# Altium PCB PW_GEN_V2.PcbDoc (part 1 of 2)
Units mm, origin at the board's own origin, x right, y up, seen from the top; angles counter-clockwise.
Board outline 65 x 40.7 mm, 6 copper layers (Top Layer, Layer 2, Layer 3, Layer 4, Layer 5, Bottom Layer), stack 1.548 mm thick; 102 components, 54 nets, 409 pads, 516 vias.
Unrouted connection lines stored in the file: 64.
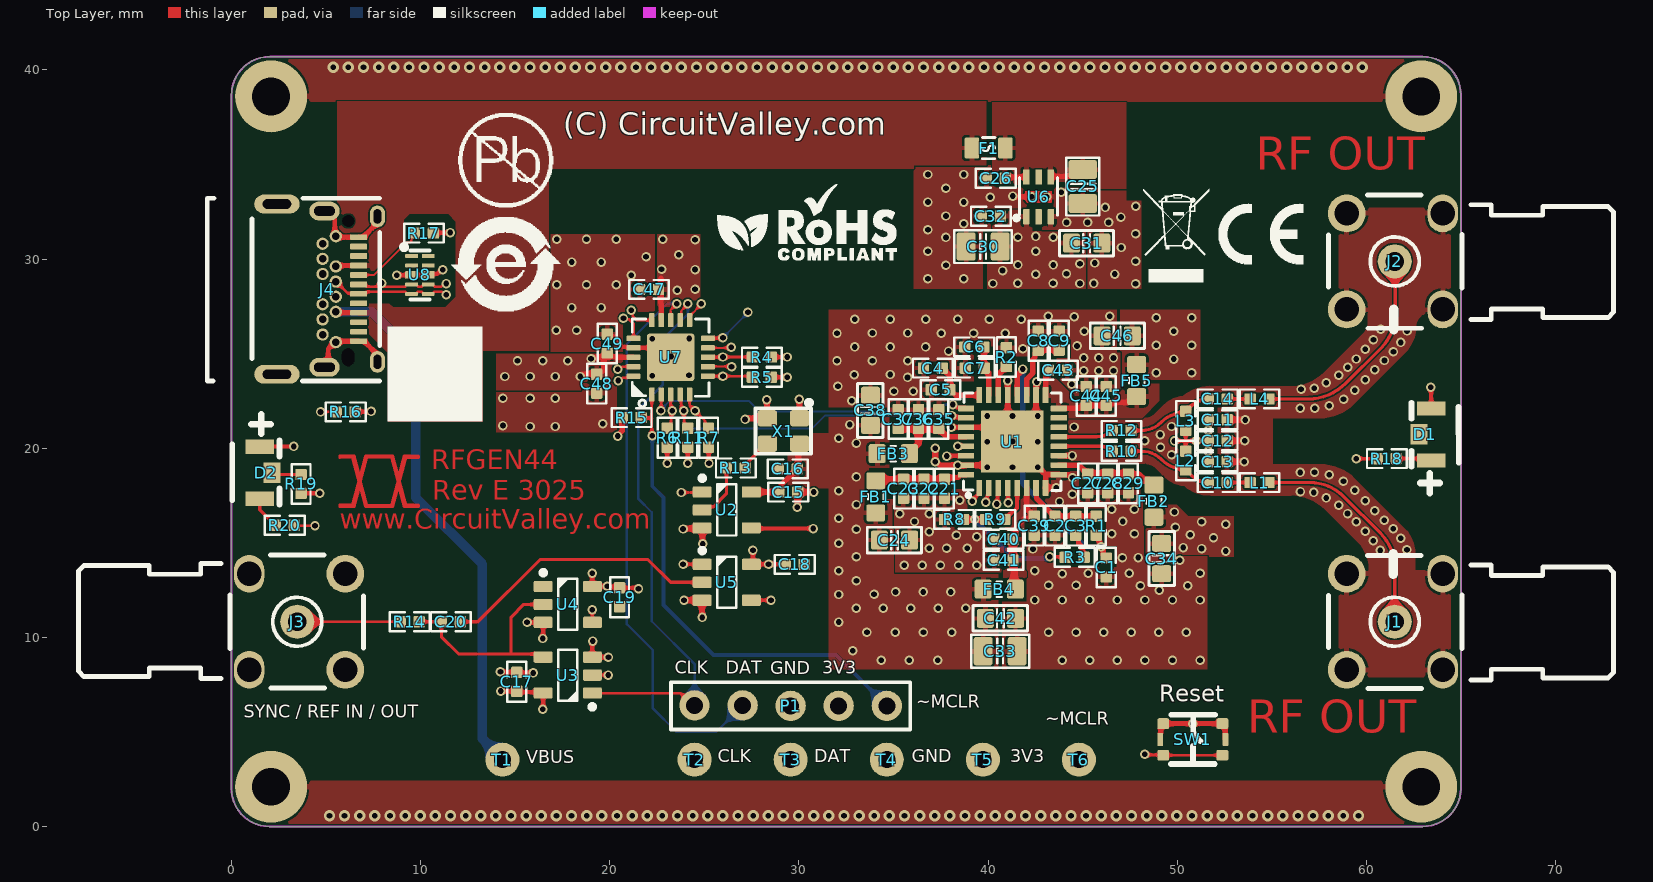
[diagram p0: Top Layer view]
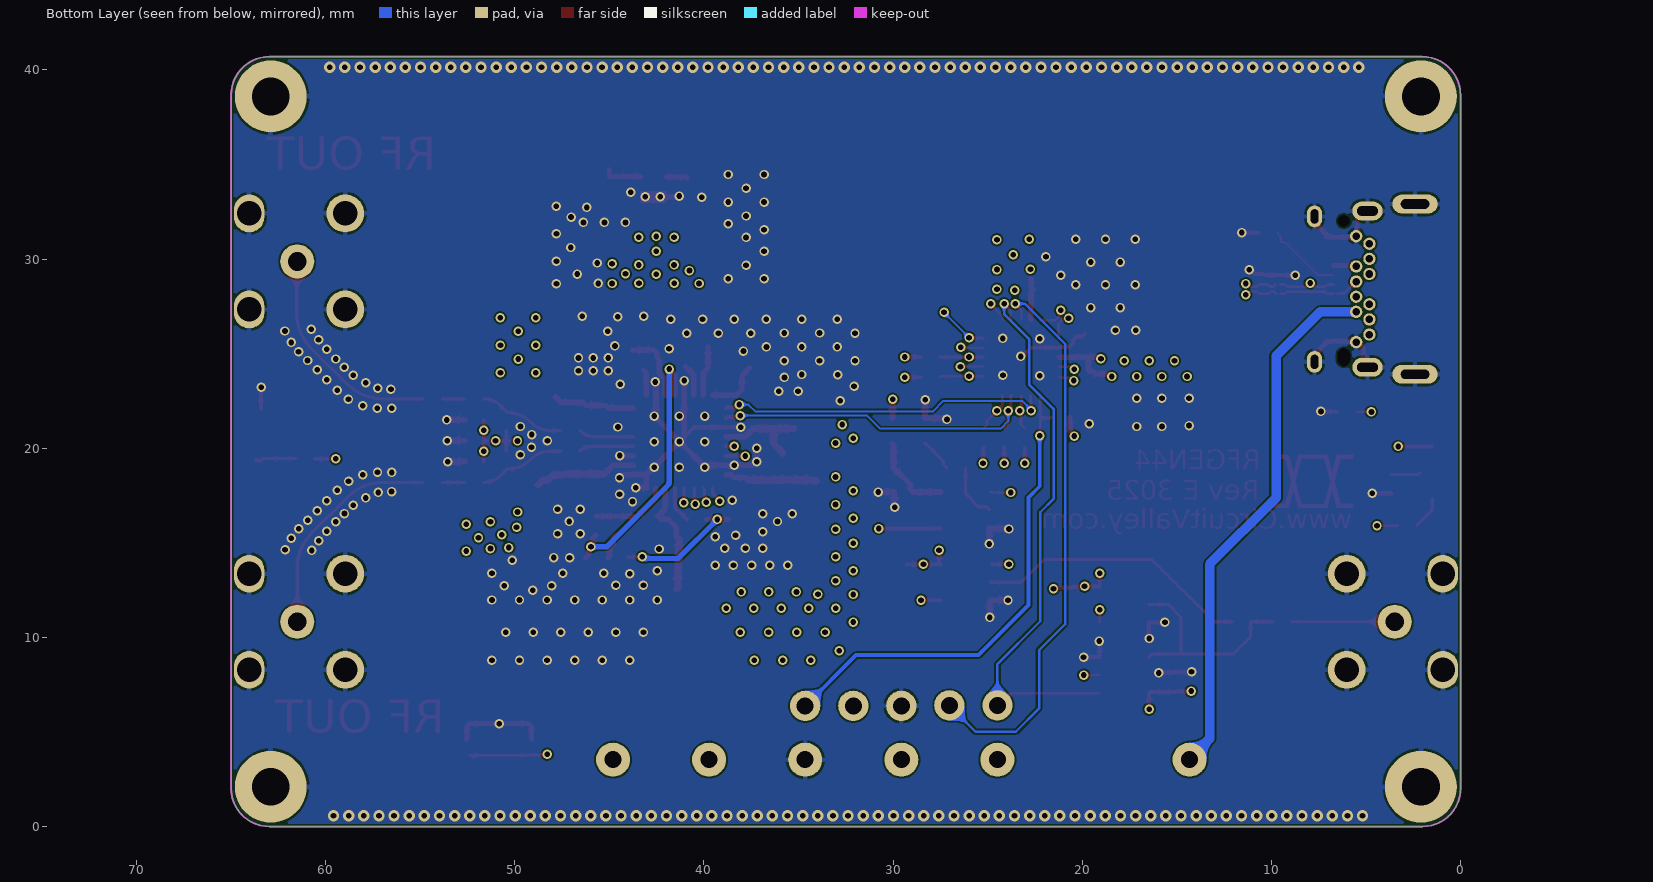
[diagram p1: Bottom Layer view, seen from below]
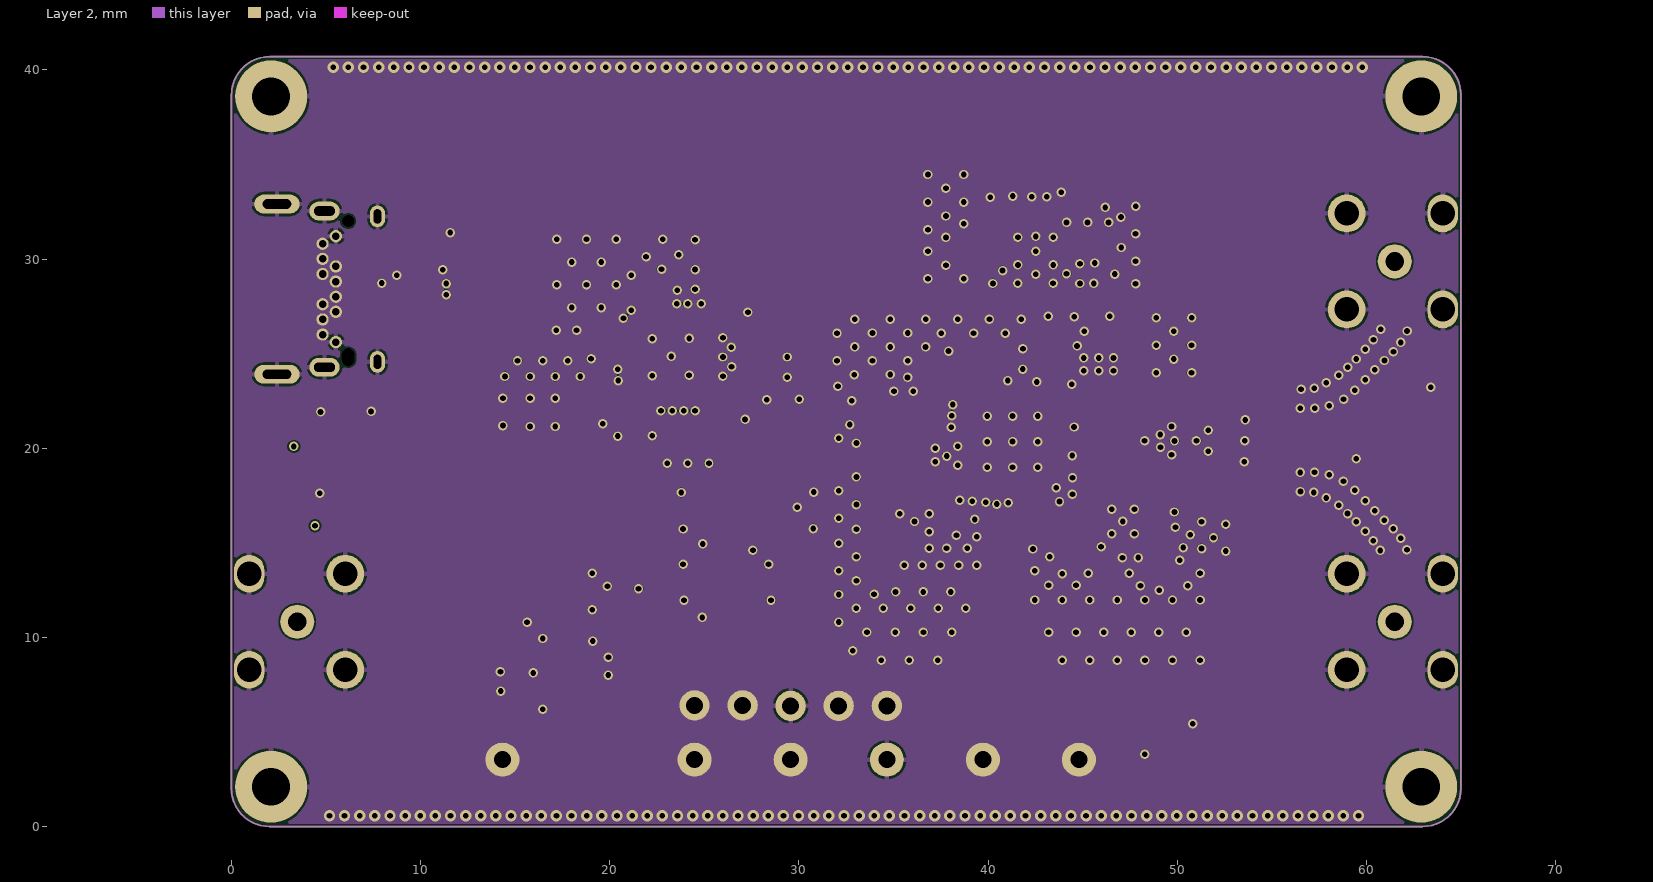
[diagram p2: Layer 2]
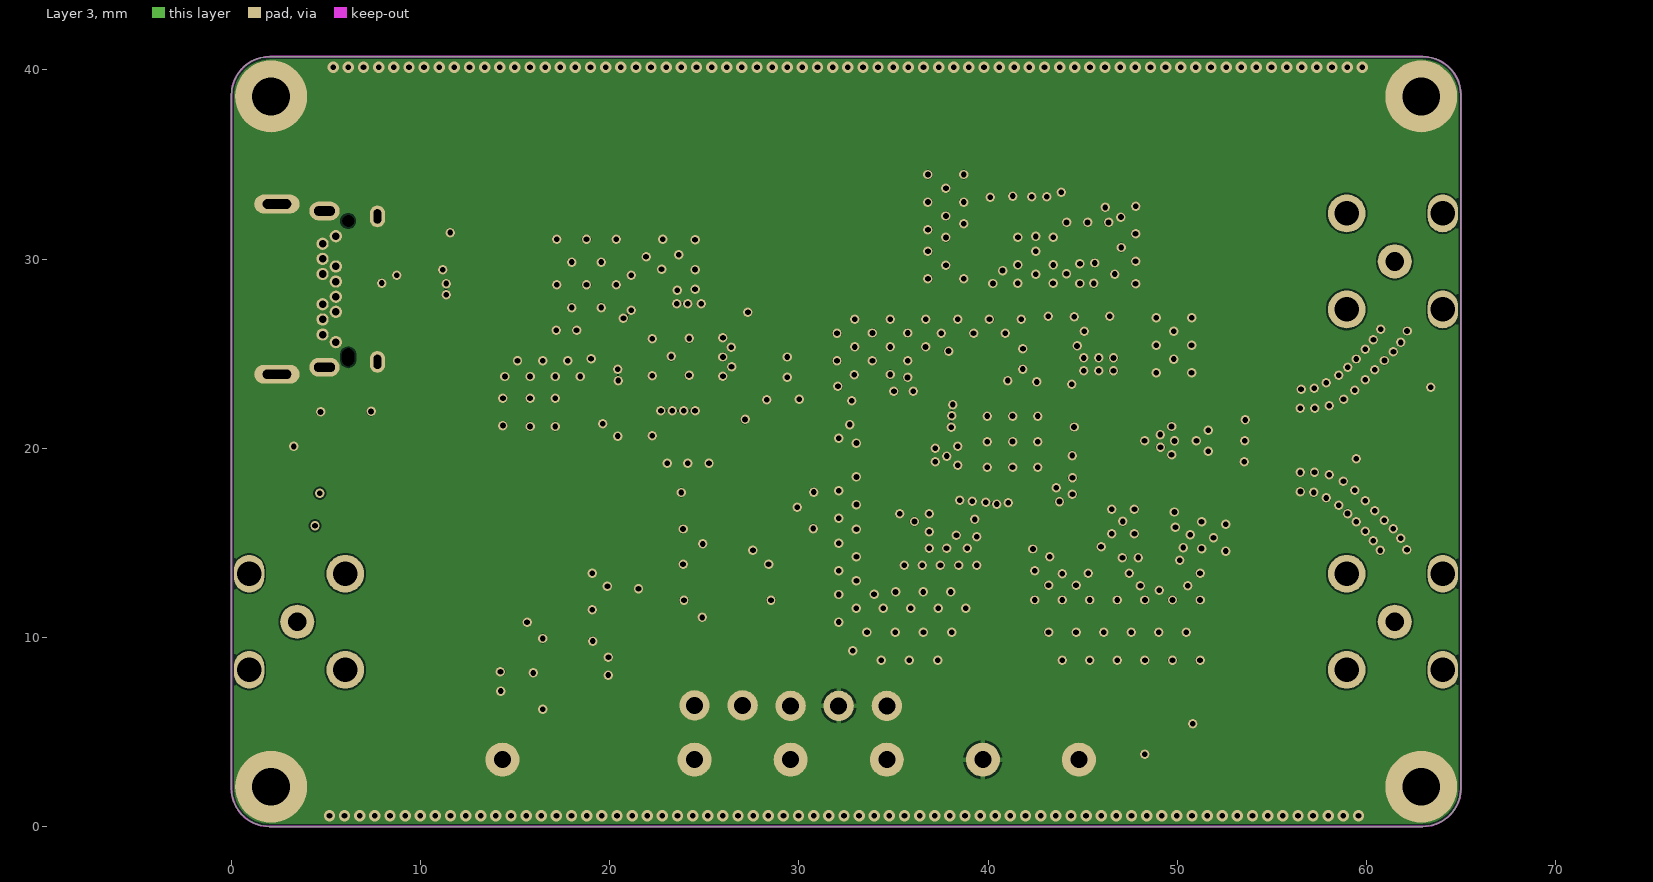
[diagram p3: Layer 3]
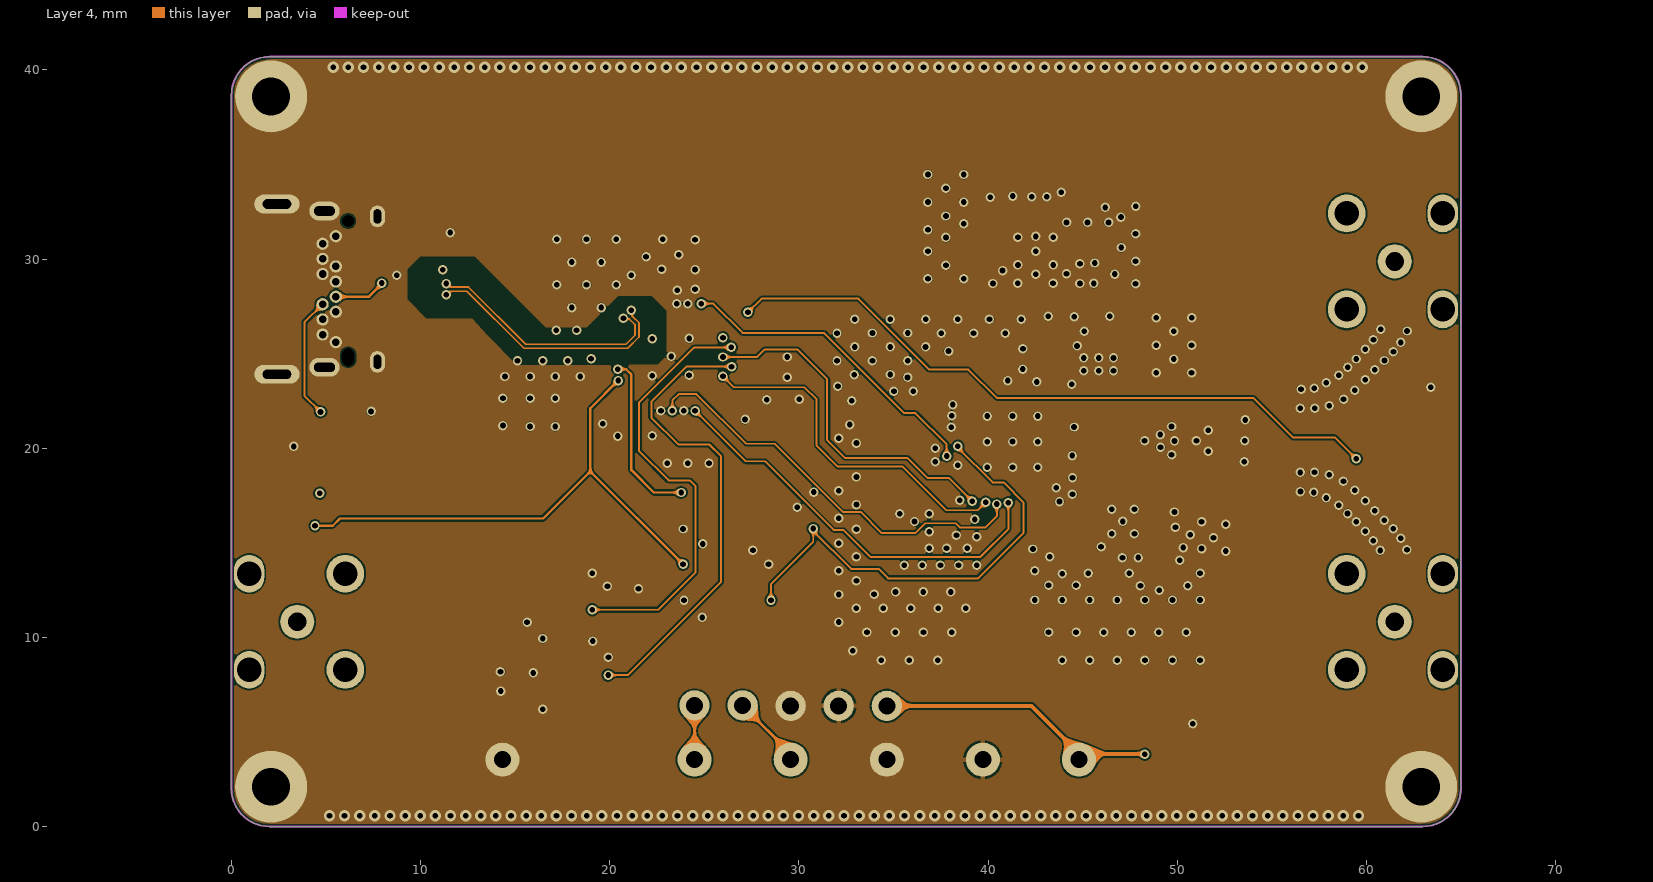
[diagram p4: Layer 4]
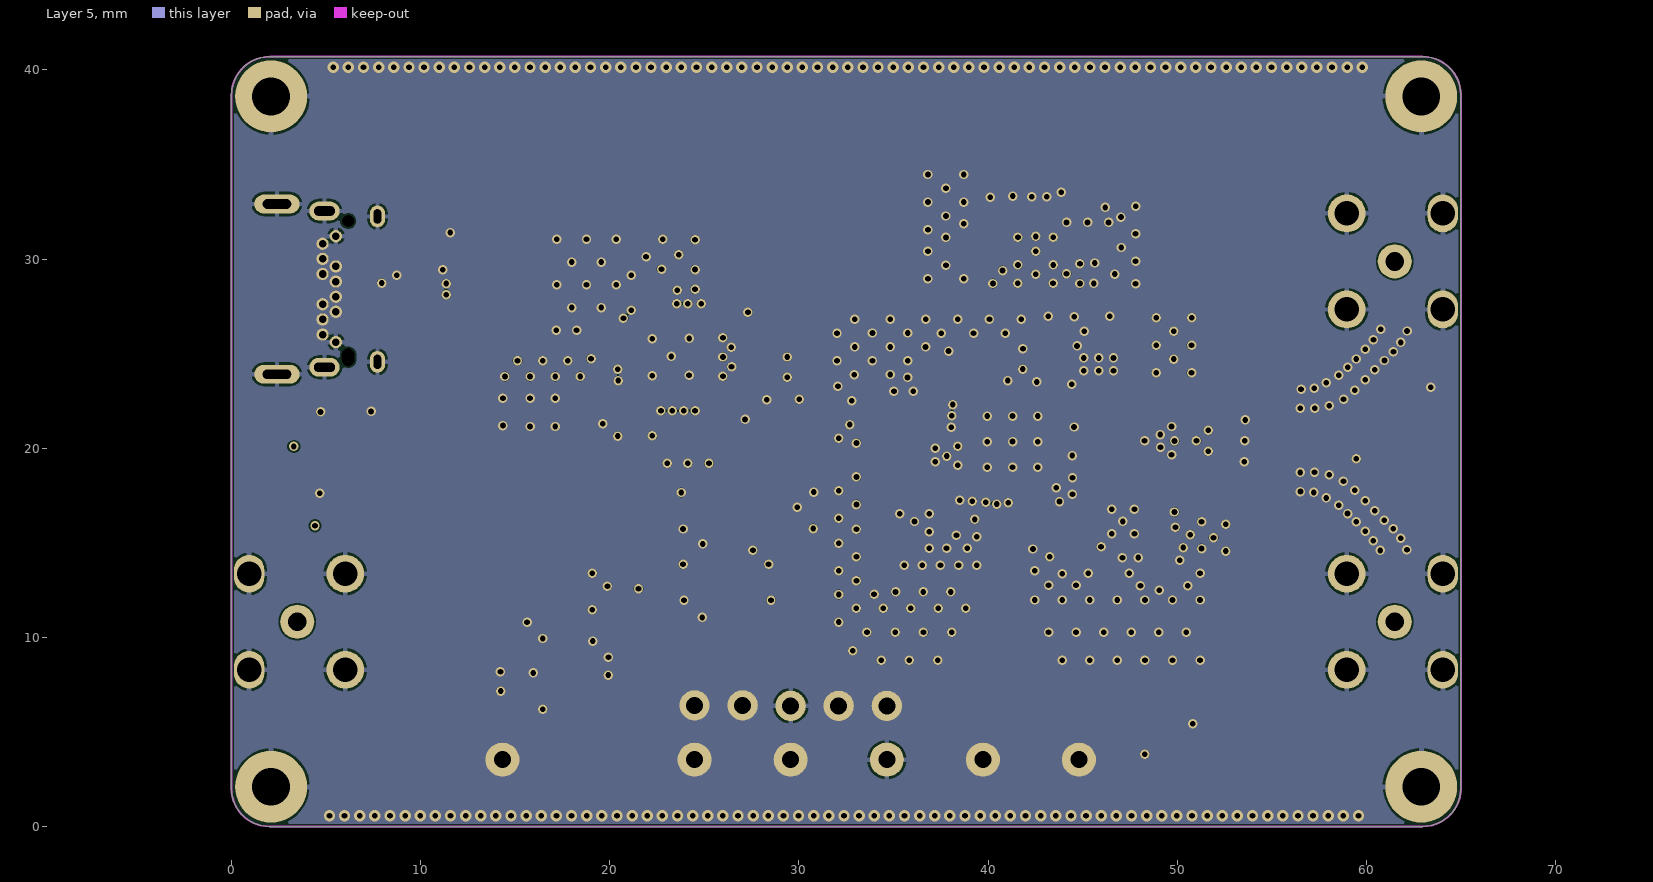
[diagram p5: Layer 5]
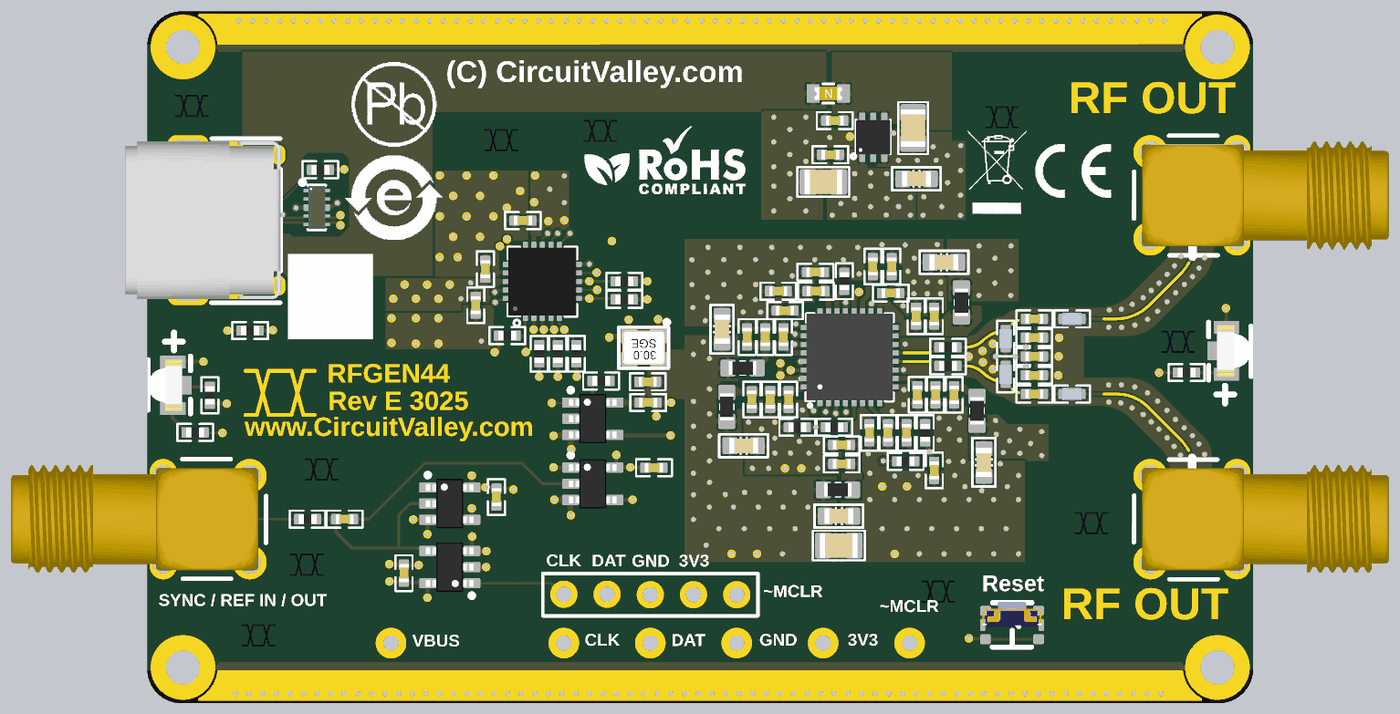
[diagram p7: 3D render of the assembled board from above, using the file's embedded part models]

## Layer stack, top to bottom
Top Solder: solder mask 0.0102, Solder Resist, Dk 3.5
Top Layer: signal copper 0.035
Dielectric 2: prepreg 0.0994, PP-015, Dk 4.3
Layer 2: signal copper 0.0175
Dielectric 4: core 0.55, FR-4, Dk 4.5
Layer 3: signal copper 0.0175
Dielectric 1: prepreg 0.1088, PP-016, Dk 4.4
Layer 4: signal copper 0.0175
Dielectric 5: core 0.55, FR-4, Dk 4.5
Layer 5: signal copper 0.0175
Dielectric 3: prepreg 0.0994, PP-015, Dk 4.3
Bottom Layer: signal copper 0.035
Bottom Solder: solder mask 0.0102, Solder Resist, Dk 3.5

## Board outline
0,2.007 ccw(c2.007,2.007) 2.007,0 62.975,0 ccw(c62.975,2.025) 65,2.025 64.998,2.025 64.998,38.662 ccw(c62.96,38.662) 62.96,40.7 2.038,40.7 ccw(c2.038,38.662) 0,38.662

## Design rules (kind name [scope] priority, off if disabled: settings)
Clearance [All] p1: gap=0.09 ignorepadtopadclearanceinfootprint=FALSE
ComponentClearance [All] p1: gap=0.254 collisioncheckmode=3 verticalgap=0 showdistances=FALSE
DiffPairsRouting [All] p1: maxlimit=0.127 minlimit=0.09 mostfreqgap=0.127 toplayer_minwidth=0.09 toplayer_maxwidth=0.254 toplayer_prefwidth=0.09 midlayer1_minwidth=0.09 midlayer1_maxwidth=0.254 midlayer1_prefwidth=0.09 midlayer2_minwidth=0.09 midlayer2_maxwidth=0.254 midlayer2_prefwidth=0.09 midlayer3_minwidth=0.09 midlayer3_maxwidth=0.254 midlayer3_prefwidth=0.09 midlayer4_minwidth=0.09 midlayer4_maxwidth=0.254 midlayer4_prefwidth=0.09 bottomlayer_minwidth=0.09 bottomlayer_maxwidth=0.254 bottomlayer_prefwidth=0.09 maxuncoupledlength=12.7
HoleSize [All] p1: absolutevalues=TRUE maxlimit=5 minlimit=0.025 maxpercent=80.000 minpercent=20.000
HoleToHoleClearance [All] p1: gap=0.2 allowstackedmicrovias=TRUE
MatchedLengths MatchedLengths_DDR_CLOCKS_STROBES [InxSignalClass('ADDR_PP1') OR InxSignalClass('ADDR_PP2') OR InxSignalClass('DATA_BL0') OR InxSignalClass('DATA_BL1') OR InxSignalClass('DATA_BL2') OR InxSignalClass('DATA_BL3')] p1: tolerance=0 checknetsindiffpair=TRUE checkdiffpairvsdiffpair=FALSE checkxsignals=FALSE checkothers=FALSE usedelayunits=TRUE delaytolerance=0.500000
MatchedLengths MatchedLengths_DATA_BL3 [InxSignalClass('DATA_BL3')] p2: tolerance=0 checknetsindiffpair=FALSE checkdiffpairvsdiffpair=TRUE checkxsignals=TRUE checkothers=TRUE usedelayunits=TRUE delaytolerance=0.500000
MatchedLengths MatchedLengths_DATA_BL2 [InxSignalClass('DATA_BL2')] p3: tolerance=0 checknetsindiffpair=FALSE checkdiffpairvsdiffpair=TRUE checkxsignals=TRUE checkothers=TRUE usedelayunits=TRUE delaytolerance=0.500000
MatchedLengths MatchedLengths_DATA_BL1 [InxSignalClass('DATA_BL1')] p4: tolerance=0 checknetsindiffpair=FALSE checkdiffpairvsdiffpair=TRUE checkxsignals=TRUE checkothers=TRUE usedelayunits=TRUE delaytolerance=0.500000
MatchedLengths MatchedLengths_DATA_BL0 [InxSignalClass('DATA_BL0')] p5: tolerance=0 checknetsindiffpair=FALSE checkdiffpairvsdiffpair=TRUE checkxsignals=TRUE checkothers=TRUE usedelayunits=TRUE delaytolerance=0.500000
MatchedLengths MatchedLengths_ADDR_PP2 [InxSignalClass('ADDR_PP2')] p6: tolerance=0 checknetsindiffpair=FALSE checkdiffpairvsdiffpair=TRUE checkxsignals=TRUE checkothers=TRUE usedelayunits=TRUE delaytolerance=0.500000
MatchedLengths MatchedLengths_ADDR_PP1 [InxSignalClass('ADDR_PP1')] p7: tolerance=0 checknetsindiffpair=FALSE checkdiffpairvsdiffpair=TRUE checkxsignals=TRUE checkothers=TRUE usedelayunits=TRUE delaytolerance=0.500000
MatchedLengths Matched_ETH_GRP [InNetClass('ETH')] p8: tolerance=0.127 checknetsindiffpair=FALSE checkdiffpairvsdiffpair=TRUE checkxsignals=TRUE checkothers=TRUE usedelayunits=TRUE delaytolerance=4.000000
MatchedLengths Matched_ETH_MD_GRP [InNetClass('ETH_MD')] p9: tolerance=0.508 checknetsindiffpair=FALSE checkdiffpairvsdiffpair=TRUE checkxsignals=TRUE checkothers=TRUE usedelayunits=TRUE delaytolerance=4.000000
MatchedLengths Matched_SD_GRP [InNetClass('SD')] p10: tolerance=2.54 checknetsindiffpair=FALSE checkdiffpairvsdiffpair=TRUE checkxsignals=TRUE checkothers=TRUE usedelayunits=TRUE delaytolerance=17.000000
MatchedLengths Matched_SD_B_GRP [InNetClass('SD_B')] p11: tolerance=2.54 checknetsindiffpair=FALSE checkdiffpairvsdiffpair=TRUE checkxsignals=TRUE checkothers=TRUE usedelayunits=TRUE delaytolerance=17.000000
MatchedLengths Matched_USB [InNetClass('USB')] p12: tolerance=2.54 checknetsindiffpair=FALSE checkdiffpairvsdiffpair=TRUE checkxsignals=TRUE checkothers=TRUE usedelayunits=TRUE delaytolerance=4.000000
MatchedLengths Matched_HDMI [InNetClass('HDMI')] p13: tolerance=2.54 checknetsindiffpair=FALSE checkdiffpairvsdiffpair=TRUE checkxsignals=TRUE checkothers=TRUE usedelayunits=TRUE delaytolerance=5.000000
MatchedLengths Matched_HDMI_GRP [InNetClass('HDMI')] p14: tolerance=2.54 checknetsindiffpair=TRUE checkdiffpairvsdiffpair=FALSE checkxsignals=FALSE checkothers=FALSE usedelayunits=TRUE delaytolerance=5.000000
MatchedLengths Matched_DDR_T_GRP [InNetClass('ETH')] p15: tolerance=0.127 checknetsindiffpair=FALSE checkdiffpairvsdiffpair=TRUE checkxsignals=TRUE checkothers=TRUE usedelayunits=TRUE delaytolerance=5.000000
MatchedLengths Matched_DDR_T [InNetClass('MIPI')] p16: tolerance=0.127 checknetsindiffpair=TRUE checkdiffpairvsdiffpair=FALSE checkxsignals=FALSE checkothers=FALSE usedelayunits=TRUE delaytolerance=5.000000
MatchedLengths Matched_MIPI1 [InNetClass('MIPI1')] p17: tolerance=0.127 checknetsindiffpair=FALSE checkdiffpairvsdiffpair=TRUE checkxsignals=TRUE checkothers=TRUE usedelayunits=TRUE delaytolerance=2.000000
MatchedLengths Matched_MIPI0 [InNetClass('MIPI0')] p18: tolerance=0.127 checknetsindiffpair=FALSE checkdiffpairvsdiffpair=TRUE checkxsignals=TRUE checkothers=TRUE usedelayunits=TRUE delaytolerance=2.000000
MatchedLengths Matched_QSPI [InNetClass('QSPI')] p19: tolerance=0.127 checknetsindiffpair=FALSE checkdiffpairvsdiffpair=TRUE checkxsignals=TRUE checkothers=TRUE usedelayunits=TRUE delaytolerance=2.000000
MatchedLengths Matched_GPIF_GRP [InNetClass('GPIF')] p20: tolerance=1.27 checknetsindiffpair=FALSE checkdiffpairvsdiffpair=TRUE checkxsignals=TRUE checkothers=TRUE usedelayunits=TRUE delaytolerance=150.000000
MinimumSolderMaskSliver [All] p1: minsoldermaskwidth=0.1
PlaneClearance [All] p1: clearance=0.152
PlaneConnect PlaneConnect_1 [All] p1: pad.planeconnectstyle=Relief pad.reliefexpansion=0.508 pad.reliefentries=4 pad.reliefconductorwidth=0.254 pad.reliefairgap=0.127 via.planeconnectstyle=Direct via.reliefexpansion=0.508 via.reliefentries=4 via.reliefconductorwidth=0.254 via.reliefairgap=0.254
PolygonConnect [All] p1: thpad.connectstyle=Relief thpad.reliefconductorwidth=0.254 thpad.reliefentries=4 thpad.polygonreliefangle="90 Angle" thpad.airgapwidth=0.127 smdpad.connectstyle=Relief smdpad.reliefconductorwidth=0.254 smdpad.reliefentries=4 smdpad.polygonreliefangle="90 Angle" smdpad.airgapwidth=0.127 via.connectstyle=Direct via.reliefconductorwidth=0.254 via.reliefentries=4 via.polygonreliefangle="90 Angle" via.airgapwidth=0.254
RoutingLayers [All] p1: top layer_v5=TRUE mid layer 1_v5=FALSE mid layer 2_v5=TRUE mid layer 3_v5=TRUE mid layer 4_v5=TRUE bottom layer_v5=TRUE
RoutingTopology RoutingTopology_DDRAddressAndControls [InNetClass('DDR_AddressAndControls')] p1: topology=Daisy_Simple
RoutingTopology [All] p2: topology=Shortest
RoutingVias [All] p1: holewidth=0.2 width=0.3 viastyle="Through Hole" minholewidth=0.2 minwidth=0.3 maxholewidth=0.5 maxwidth=7
SilkToSilkClearance [All] p1: silktosilkclearance=0
SilkToSolderMaskClearance [IsPad] p1: minsilkscreentomaskgap=0 clearancetoexposedcopper=TRUE
SolderMaskExpansion [All] p1: expansion=0 istentingtop=FALSE
Width [All] p1: maxlimit=1.27 minlimit=0.09 preferedwidth=0.09 toplayer_minwidth=0.09 midlayer1_prefwidth=0.127 bottomlayer_minwidth=0.09 bottomlayer_prefwidth=0.127 minimp=50.000000 maximp=50.000000 favimp=50.000000
19 further rules are at their usual default settings.

## Classes and differential pairs
component class RF_GEN: C1 C2 C3 C4 C5 C6 C7 C8 C9 C10 C11 C12 C13 C14 C15 C16 C17 C18 C19 C20 J1 J2 J3 L1 L2 L3 L4 R1 R2 R3 R4 R5 R6 R7 R8 R9 R10 R11 R12 R13 R14 U1 U2 U3 U4 U5 X1
component class power: C21 C22 C23 C24 C25 C26 C27 C28 C29 C30 C31 C32 C33 C34 C35 C36 C37 C38 C39 C40 C41 C42 C43 C44 C45 C46 FB1 FB2 FB3 FB4 FB5 U6
net class USB2: D_N D_P
component class MCU: C47 C48 C49 D1 D2 F1 J4 P1 R15 R16 R17 R18 R19 R20 SW1 T1 T2 T3 T4 T5 T6 U7 U8
differential pair D: +D_P -D_N

## Components (designator, comment, footprint, x,y, rotation, side; value= is the part's Value field where it differs from the comment)
C1 "680p" CAPC1005N 46.253,13.694 r270 top
C2 "2.7n" CAPC1005N 43.536,15.904 r270 top
C3 "47n" CAPC1005N 44.628,15.904 r270 top
C4 "100n" CAPC1005N 37.084,24.235 r180 top
C5 "10p" CAPC1005N 37.49,23.092 r180 top
C6 "100n" CAPC1005N 39.268,25.352 r180 top
C7 "10p" CAPC1005N 39.294,24.235 r180 top
C8 "100n" CAPC1005N 42.647,25.683 r90 top
C9 "10p" CAPC1005N 43.759,25.683 r90 top
C10 "1n" CAPC1005N 52.143,18.185 r180 top
C11 "120p" CAPC1005N 52.138,21.499 r180 top
C12 "100n" CAPC1005N 52.138,20.395 r180 top
C13 "120p" CAPC1005N 52.138,19.29 r180 top
C14 "1n" CAPC1005N 52.143,22.604 r180 top
C15 "100n" CAPC1005N 29.439,17.683 r180 top
C16 "100n" CAPC1005N 29.413,18.902 r0 top
C17 "100n" CAPC1005N 15.088,7.65 r270 top
C18 "100n" CAPC1005N 29.779,13.852 r180 top
C19 "100n" CAPC1005N 20.521,12.123 r90 top
C20 "100n" CAPC1005N 11.6,10.825 r180 top
C21 "10p" CAPC1005N 37.694,17.859 r270 top
C22 "100n" CAPC1005N 36.614,17.859 r270 top
C23 "470n" CAPC1005N 35.535,17.859 r270 top
C24 "approved sub OK" CAPC1608N 35.052,15.142 r0 top value=10u
C25 "approved sub OK" CAPC2012N 45.009,33.837 r270 top value=100u
C26 "100n" CAPC1005N 40.403,34.269 r0 top
C27 "10p" CAPC1005N 45.263,18.139 r270 top
C28 "100n" CAPC1005N 46.33,18.139 r270 top
C29 "470n" CAPC1005N 47.422,18.139 r270 top
C30 "approved sub OK" CAPC2012N 39.74,30.662 r180 top value=100u
C31 "approved sub OK" CAPC1608N 45.212,30.842 r0 top value=10u
C32 "100n" CAPC1005N 40.149,32.263 r0 top
C33 "approved sub OK" CAPC2012N 40.64,9.271 r0 top value=100u
C34 "approved sub OK" CAPC1608N 49.174,14.164 r270 top value=10u
C35 "10p" CAPC1005N 37.389,21.542 r90 top
C36 "100n" CAPC1005N 36.322,21.542 r90 top
C37 "470n" CAPC1005N 35.255,21.542 r90 top
C38 "approved sub OK" CAPC1608N 33.782,22.001 r90 top value=10u
C39 "10p" CAPC1005N 42.443,15.904 r270 top
C40 "100n" CAPC1005N 40.818,15.192 r180 top
C41 "470n" CAPC1005N 40.818,14.075 r180 top
C42 "approved sub OK" CAPC1608N 40.653,11.001 r0 top value=10u
C43 "10p" CAPC1005N 43.699,24.12 r0 top
C44 "100n" CAPC1005N 45.187,22.762 r90 top
C45 "470n" CAPC1005N 46.253,22.762 r90 top
C46 "approved sub OK" CAPC1608N 46.825,25.938 r180 top value=10u
C47 "470n" CAPC1005N 22.079,28.39 r0 top
C48 "100n" CAPC1005N 19.308,23.411 r90 top
C49 "470n" CAPC1005N 19.869,25.532 r270 top
D1 "12-22SURSYGC" 12-22SURSYGC/S530-A2/TR8 63.424,20.726 r270 top
D2 "12-22SURSYGC" 12-22SURSYGC/S530-A2/TR8 1.499,18.699 r90 top
F1 "0467.500NRHF" 0467005.NRHF 40.03,35.869 r0 top
FB1 "Ferrite" INDC1608N 34.061,17.428 r90 top
FB2 "Ferrite" INDC1608N 48.768,17.199 r90 top
FB3 "Ferrite" INDC1608N 34.989,19.714 r0 top
FB4 "Ferrite" INDC1608N 40.589,12.551 r0 top
FB5 "Ferrite" INDC1608N 47.854,23.574 r270 top
J1 "SMA" BWSMA-KWE-Z001 61.5,10.825 r270 top
J2 "SMA" BWSMA-KWE-Z001 61.5,29.875 r270 top
J3 "SMA" BWSMA-KWE-Z001 3.48,10.825 r90 top
J4 "USB C Connector" UT11113-11602-7H 2.843,28.408 r270 top
L1 "1n9" 0402_Inductor 54.353,18.185 r180 top
L2 "7n5" 0402_Inductor 50.448,19.345 r270 top
L3 "7n5" 0402_Inductor 50.448,21.445 r270 top
L4 "1n9" 0402_Inductor 54.353,22.604 r180 top
P1 "Header" HEADER5X 29.566,6.38 r180 top
R1 "Thick Film" RESC1005N 45.72,15.904 r270 top value=1K
R2 "Thick Film" RESC1005N 40.97,24.819 r90 top value=5.1K
R3 "Thick Film" RESC1005N 44.577,14.227 r0 top value=360R
R4 "Thick Film" RESC1005N 28.042,24.82 r0 top value=5.1K
R5 "Thick Film" RESC1005N 28.042,23.754 r0 top value=5.1K
R6 "Thick Film" RESC1005N 23.038,20.553 r270 top value=5.1K
R7 "Thick Film" RESC1005N 25.222,20.553 r270 top value=5.1K
R8 "Thick Film" RESC1005N 38.202,16.234 r0 top value=0R
R9 "Thick Film" RESC1005N 40.386,16.234 r0 top value=NC
R10 "Thick Film" RESC1005N 47.059,19.844 r0 top value=0R
R11 "Thick Film" RESC1005N 24.13,20.553 r90 top value=5.1K
R12 "Thick Film" RESC1005N 47.059,20.936 r0 top value=0R
R13 "Thick Film" RESC1005N 26.67,18.953 r180 top value=0R
R14 "Thick Film" RESC1005N 9.423,10.825 r0 top value=200R
R15 "Thick Film" RESC1005N 21.158,21.62 r180 top value=5.1K
R16 "Thick Film" RESC1005N 6.043,21.916 r0 top value=5.1K
R17 "Thick Film" RESC1005N 10.177,31.375 r0 top value=5.1K
R18 "Thick Film" RESC1005N 61.084,19.451 r0 top value=200R
R19 "Thick Film" RESC1005N 3.683,18.11 r270 top value=360R
R20 "Thick Film" RESC1005N 2.819,15.926 r0 top value=200R
SW1 "SKSGPAE010" SKSGPAE010 50.825,4.602 r180 top
T1 "TestHook" Test_PAD_0851-0-15-20-82-14-11-0#1 16.002,3.535 r0 top
T2 "TestHook" Test_PAD_0851-0-15-20-82-14-11-0#2 24.486,3.535 r180 top
T3 "TestHook" Test_PAD_0851-0-15-20-82-14-11-0#2 29.566,3.535 r180 top
T4 "TestHook" Test_PAD_0851-0-15-20-82-14-11-0#2 34.646,3.535 r180 top
T5 "TestHook" Test_PAD_0851-0-15-20-82-14-11-0#2 39.726,3.535 r180 top
T6 "TestHook" Test_PAD_0851-0-15-20-82-14-11-0#2 44.806,3.535 r180 top
U1 "ADF4351" VQFN32 41.289,20.353 r0 top
U2 "SN74LVC1G125DBVR" SOT23-5 26.184,16.734 r0 top
U3 "SN74LVC1G125DBVR" SOT23-5 17.78,8.006 r180 top
U4 "SN74LVC1G125DBVR" SOT23-5 17.78,11.739 r0 top
U5 "SN74LVC1G125DBVR" SOT23-5 26.184,12.908 r0 top
U6 "AP7347DQ-33FDZW-7" WDFN2020-6 42.672,33.287 r0 top
U7 "PIC16(L)F1459-I/GZ" QFN20_4x4 23.222,24.806 r90 top
U8 "SP3010-04UTG" uDFN-10 9.964,29.158 r90 top
X1 "DSO221SR" "Active Oscillator 2520" 29.185,20.909 r180 top value=25Mhz

## Footprints (in the part's own frame and the unit in brackets; to place one, negate y for a bottom-side part, rotate by r counter-clockwise, add the part's x,y. Pads: shape width x height; smd on the part's side, far side on the other; paste and mask are expansions set on the pad)
12-22SURSYGC/S530-A2/TR8 [mm] "Everlight SMD Bi color LED"
  rect 0.75x1.5 smd: A(1.375,0) C1(-1.375,0)
  rect 1.08x0.9 smd: C2(0,-0.65)
  silkscreen extent -1.68,-1.04 3.1,1.46, body extent -1.5,-0.54 1.5,1.46, height 1.01
0402_Inductor [mm]
  round 0.2 on Mech14: 0(0,0)
  rrect20% 0.6x0.6 smd: 1(-0.5,0) 2(0.5,0)
  Top Layer pour cut-out: -0.2,0.35 0.2,0.35 0.2,-0.35 -0.2,-0.35
  silkscreen extent -1.05,-0.5 1.05,0.5, body extent -0.56,-0.36 0.56,0.36, height 0.67
0467005.NRHF [mil] "5A little fuse 0603"
  rrect15% 30x42.91 smd: 1(-35,0) 2(35,0)
  Top Layer pour cut-out: -16.04,18.29 16.13,18.29 16.13,-19.2 -16.04,-19.2 -16.04,12.54
  silkscreen extent -13,-22 13,22, body extent -32,-16 31,16, height 14
"Active Oscillator 2520" [mm]
  rrect25% 1x0.85 smd: 1(-0.85,-0.675) 2(0.85,-0.675) 3(0.85,0.675) 4(-0.85,0.675)
  silkscreen extent -1.45,-1.55 1.47,1.2, body extent -1.25,-1 1.25,1, height 0.56
BWSMA-KWE-Z001 [mm] "SMA Right Angle"
  round 1.8 hole 1: 1(0,0)
  oval 2x1.6 hole 1.3: 2(-2.54,2.54) 2(2.54,2.54)
  round 2 hole 1.3: 2(-2.54,-2.54) 2(2.54,-2.54)
  silkscreen extent -3.51,-3.5 3.53,11.56, body extent -3.17,-3.04 3.18,11.46, height 9.79
CAPC1005N [mm] "Chip Capacitor, Body 1.0x0.5mm, 0402, IPC Medium Density"
  round 0.2 on Mech14: 0(0,0)
  rrect20% 0.6x0.6 smd: 1(-0.5,0) 2(0.5,0)
  Top Layer pour cut-out: -0.2,0.35 0.2,0.35 0.2,-0.35 -0.2,-0.35
  silkscreen extent -1.05,-0.5 1.05,0.5, body extent -0.52,-0.27 0.53,0.28, height 0.55
CAPC1608N [mm] "Chip Capacitor, Body 1.6x0.8mm, 0603, IPC Medium Density"
  round 0.254 on Mech14: 0(0,0)
  rrect25% 0.9x1 smd: 1(-0.8,0) 2(0.8,0)
  silkscreen extent -1.44,-0.67 1.42,0.68, body extent -0.85,-0.45 0.85,0.45, height 0.89
CAPC2012N [mm] "Chip Capacitor, Body 2.0x1.2mm, 0805, IPC Medium Density"
  round 0.254 on Mech14: 0(0,0)
  rrect25% 1x1.5 smd: 1(-0.9,0) 2(0.9,0)
  silkscreen extent -1.52,-0.87 1.54,0.87, body extent -1.1,-0.72 1.1,0.73, height 1.34
HEADER5X [mm] "Standard 2.54 5 pin"
  round 1.6 hole 0.9: 1(-5.08,0) 2(-2.54,0) 3(0,0) 4(2.54,-0.025) 5(5.08,-0.025)
  silkscreen extent -6.32,-1.24 6.32,1.24
INDC1608N [mm] "Chip bead, Body 1.6x0.8mm, 0603, IPC Medium Density"
  round 0.254 on Mech14: 0(0,0)
  rrect25% 0.9x1 smd: 1(-0.85,0) 2(0.85,0)
  Top Layer pour cut-out: -0.4,0.6 0.4,0.6 0.4,-0.6 -0.4,-0.6
  silkscreen extent -0.15,-0.41 0.15,0.41, body extent -0.8,-0.4 0.8,0.4, height 0.79
QFN20_4x4 [mm]
  rrect35% 0.73x0.3 smd: 1(-1.965,1) 2(-1.965,0.5) 3(-1.965,0) 4(-1.965,-0.5) 5(-1.965,-1) 11(1.965,-1) 12(1.965,-0.5) 13(1.965,0) 14(1.965,0.5) 15(1.965,1)
  rrect35% 0.3x0.73 smd: 6(-1,-1.965) 7(-0.5,-1.965) 8(0,-1.965) 9(0.5,-1.965) 10(1,-1.965) 16(1,1.965) 17(0.5,1.965) 18(0,1.965) 19(-0.5,1.965) 20(-1,1.965)
  rrect10% 2.5x2.5 smd: 21(0,0)
  silkscreen extent -2.62,-2.03 2.03,2.03, body extent -2.01,-2.01 2.01,2.01, height 0.81
RESC1005N [mm] "Chip Resistor, Body 1.0x0.5mm, EIA 0402, IPC Medium Density"
  round 0.2 on Mech14: 0(0,0)
  rrect20% 0.6x0.6 smd: 1(-0.5,0) 2(0.5,0)
  Top Layer pour cut-out: -0.2,0.35 0.2,0.35 0.2,-0.35 -0.2,-0.35
  silkscreen extent -1.05,-0.5 1.05,0.5, body extent -0.52,-0.27 0.53,0.28, height 0.4
SKSGPAE010 [mm] "Switch 3x2.7"
  rrect30% 0.625x0.57 smd: 1(-1.562,-0.837) 1(1.562,-0.837) 2(-1.562,0.837) 2(1.562,0.837)
  rrect30% 0.3x0.7 smd: 3(-1.725,0) 3(1.725,0)
  silkscreen extent -1.17,-1.31 1.16,1.3, body extent -1.76,-1.39 1.76,1.39, height 1.41
SOT23-5 [mm]
  round 0.5 on Mech14: 0(0,0)
  rrect25% 1x0.6 smd: 1(-1.3,0.95) 2(-1.3,0) 3(-1.3,-0.95) 4(1.3,-0.95) 5(1.3,0.95)
  silkscreen extent -1.42,-1.35 0.51,1.81, body extent -1.4,-1.45 1.4,1.45, height 1.44
Test_PAD_0851-0-15-20-82-14-11-0#1 [mm]
  round 1.8 hole 0.9: 1(-1.676,0)
Test_PAD_0851-0-15-20-82-14-11-0#2 [mm]
  round 1.8 hole 0.9: 1(0,0)
uDFN-10 [mm] "SP3010-04UTG"
  rrect30% 0.2x0.675 smd: 1(1,0.437) 2(0.5,0.437) 4(-0.5,0.437) 5(-1,0.437) 6(-1,-0.437) 7(-0.5,-0.437) 9(0.5,-0.437) 10(1,-0.437)
  rrect30% 0.4x0.675 smd: 3(0,0.437) 8(0,-0.437)
  silkscreen extent -1.3,-0.51 1.61,0.97, body extent -1.25,-0.5 1.25,0.5, height 0.56
UT11113-11602-7H [mm] "Foxconn USB connector"
  oval 1x2.4 hole 0.5 slot 1.5 at 90 deg: 0(-4.5,-0.438) 0(4.5,-0.438)
  oval 1x1.6 hole 0.5 slot 1.1 at 90 deg: 0(-4.13,2.077) 0(4.13,2.077)
  oval 1.15x0.8 hole 0.4 slot 0.75 at 0 deg: 0(-3.845,4.877) 0(3.845,4.877)
  round 0.1 hole 0.65 unplated: 1(-3.6,3.327)
  round 0.1 hole 0.65 slot 0.95 at 0 deg unplated: 1(3.6,3.327)
  rrect20% 0.3x0.9 smd: A1(-2.75,3.887) A2(-2.25,3.887) A3(-1.75,3.887) A4(-1.25,3.887) A5(-0.75,3.887) A6(-0.25,3.887) A7(0.25,3.887) A8(0.75,3.887) A9(1.25,3.887) A10(1.75,3.887) A11(2.25,3.887) A12(2.75,3.887)
  round 0.65 hole 0.4: B1(2.8,2.677) B2(2.4,1.977) B3(1.6,1.977) B4(1.2,2.677) B5(0.8,1.977) B6(0.4,2.677) B7(-0.4,2.677) B8(-0.8,1.977) B9(-1.2,2.677) B10(-1.6,1.977) B11(-2.4,1.977) B12(-2.8,2.677)
  silkscreen extent -4.8,-4.12 4.85,5, body extent -4.64,-4.11 4.64,4.99, height 3.36
VQFN32 [mm] "USB3320"
  rrect15% 0.3x0.85 smd: 1(-1.75,-2.45) 2(-1.25,-2.45) 3(-0.75,-2.45) 4(-0.25,-2.45) 5(0.25,-2.45) 6(0.75,-2.45) 7(1.25,-2.45) 8(1.75,-2.45) 17(1.75,2.45) 18(1.25,2.45) 19(0.75,2.45) 20(0.25,2.45) 21(-0.25,2.45) 22(-0.75,2.45) 23(-1.25,2.45) 24(-1.75,2.45)
  rrect15% 0.85x0.3 smd: 9(2.45,-1.75) 10(2.45,-1.25) 11(2.45,-0.75) 12(2.45,-0.25) 13(2.45,0.25) 14(2.45,0.75) 15(2.45,1.25) 16(2.45,1.75) 25(-2.45,1.75) 26(-2.45,1.25) 27(-2.45,0.75) 28(-2.45,0.25) 29(-2.45,-0.25) 30(-2.45,-0.75) 31(-2.45,-1.25) 32(-2.45,-1.75)
  rrect2% 3.3x3.3 smd: 33(0,0)
  silkscreen extent -2.59,-2.94 2.57,2.57, body extent -2.56,-2.56 2.56,2.56, height 1.01
WDFN2020-6 [mm] "AP7347DQ-33FDZW-7"
  rrect20% 0.35x0.8 smd: 1(-0.65,-1.05) 2(0,-1.05) 3(0.65,-1.05) 4(0.65,1.05) 5(0,1.05) 6(-0.65,1.05)
  round 0.025 smd: 7(0,0)
  Top Layer region: -0.7,0.27 -0.698,0.281 -0.691,0.291 -0.682,0.297 -0.671,0.3 -0.671,0.3 0.67,0.3 0.682,0.297 0.691,0.291 0.698,0.281 0.7,0.27 0.7,0.27 0.7,-0.27 0.698,-0.282 0.691,-0.291 0.682,-0.298 0.67,-0.3 0.67,-0.3 -0.587,-0.3 -0.7,-0.187 -0.7,-0.187
  silkscreen extent -1.29,-1.24 1,1.03, body extent -1,-1.04 1,1.04, height 0.66

## Part data
C1 C2 C3 C4 C5 C6 C7 C8 C9 C10 C11 C12 C13 C14 C15 C16 C17 C18 C19 C20 C21 C22 C23 C26 C27 C28 C29 C32 C35 C36 C37 C39 C40 C41 C43 C44 C45 C47 C48 C49: library part CAPC_10n_0402_16V_10%, "Capacitor SMD Cer 10nF 10% 16V X7R 0402", Manufacturer 1="AVX Corporation", Manufacturer 2=Yageo, Manufacturer Part Number 1=0402YC103KAT2A, Manufacturer Part Number 2=CC0402KRX7R7BB103, Operating Temperature="-55°C ~ 125°C", Package / Case="0402 (1005 Metric)", Ratings="16V; X7R", Supplier Part Number 1=478-1114-1-ND, Tolerance=±10%, ComponentLink1Description=http://www.avx.com/docs/Catalogs/cx7r.pdf, ComponentLink1URL=http://www.avx.com/docs/Catalogs/cx7r.pdf, ComponentLink2Description=http://www.yageo.com/documents/recent/UPY-GPHC_X7R_6.3V-to-50V_8.pdf, ComponentLink2URL=http://www.yageo.com/documents/recent/UPY-GPHC_X7R_6.3V-to-50V_8.pdf, Size / Dimension="0.039\" L x 0.020\" W (1.00mm x 0.50mm)", Supplier 1=Digi-Key, Supplier 2=Digi-Key, Supplier Part Number 2=311-1042-1-ND
C24 C31 C34 C38 C42 C46: library part CAPC_560p_0603_5%, "Capacitor SMD Cer 560pF 5% 50V NP0 0603", Capacitance=470pF, Manufacturer 1="AVX Corporation", Manufacturer Part Number 1=06035A561JAT2A, Operating Temperature="-55°C ~ 125°C", Package / Case="0603 (1608 metric)", Ratings="50V; NP0", Supplier Part Number 1=478-1184-1-ND, Voltage - Rated=50V, Applications="General Purpose", ComponentLink1Description=http://www.avx.com/docs/Catalogs/ccog.pdf, ComponentLink1URL=http://www.avx.com/docs/Catalogs/ccog.pdf, Height - Seated (Max)=-, Lead Spacing=-, Lead Style=-, Material=ceramic, Mounting Type="Surface Mount, MLCC", Size / Dimension="0.063\" L x 0.032\" W (1.60mm x 0.81mm)", Supplier 1=Digi-Key, Thickness (Max)="0.035\" (0.90mm)"
C25 C30 C33: library part CAPC_1u_0805, "Capacitor SMD Cer 1uF 10% 16V X7R 0805", Manufacturer 1="TDK Corporation", Manufacturer Part Number 1=C2012X7R1C105K/1.25, Package / Case="0805 (2012 metric)", Ratings="16V; X7R", Supplier Part Number 1=445-1358-1-ND, Tolerance=±10%, Material=ceramic, Supplier 1=Digi-Key
D1 D2: library part BI_LED, "12-22SURSYGC/S530-A3/E2/TR8"
F1: library part Fuse, "0467005.NRHF"
J1 J2 J3: library part "SMA Connector"
J4: library part USB_C, "USB C connector"
L1 L2 L3 L4: library part inductor_smd
P1: library part Header_5Pin, "5 Pin Header"
R1 R2 R3 R4 R5 R6 R7 R8 R9 R10 R11 R12 R13 R14 R15 R16 R17 R18 R19 R20: library part RES_3K3_0402_5%, "Resistor SMD chip 3.3k Ohm 0.063W 5% 0402", Manufacturer 1=Yageo, Manufacturer Part Number 1=RC0402JR-073K3L, Package / Case="0402 (1005 metric)", Ratings="1/16 W", Supplier Part Number 1=311-3.3KJRCT-ND, Tolerance=±5%, ComponentLink1Description=http://www.yageo.com/documents/recent/PYu-RC0402_51_RoHS_L_6.pdf, ComponentLink1URL=http://www.yageo.com/documents/recent/PYu-RC0402_51_RoHS_L_6.pdf, Material="Thick Film", Supplier 1=Digi-Key
SW1: library part PushButton_Grounded
U1: "Fanout Distribution, Fractional N, Integer N, Clock/Frequency Synthesizer (RF) IC 4.4GHz 1 32-VFQFN Exposed Pad, CSP", Package=None, Availability="In Stock", Check_prices=https://www.snapeda.com/parts/ADF4351/Analog+Devices/view-part/?ref=eda, MF="Analog Devices, Inc.", MP=ADF4351, Price=None, SnapEDA_Link=https://www.snapeda.com/parts/ADF4351/Analog+Devices/view-part/?ref=snap
U2 U3 U4 U5: "LVC Tristate buffer"
U6: "Linear Voltage Regulator IC Positive 500mA Very High PSRR", Package="UDFN-8 Diodes Inc.", Check_prices=https://www.snapeda.com/parts/AP7361C-FGE-7/Diodes+Inc./view-part/?ref=eda, MF="Diodes Inc.", MP=AP7361C-FGE-7, SnapEDA_Link=https://www.snapeda.com/parts/AP7361C-FGE-7/Diodes+Inc./view-part/?ref=snap
U8: "ESD Protection"
X1: library part Oscillator_2520, "Active Oscillator_2520"

## Free pads (board coordinates)
  round 3.8 hole 2: A5(2.1,2.1) A5(2.1,38.6) A5(62.9,2.1) A5(62.9,38.6)

## Via types
v1: diameter 0.5, hole 0.3, Top Layer to Bottom Layer, 225 vias
v2: diameter 0.5, hole 0.3, Top Layer to Bottom Layer, tented top, 152 vias
v3: diameter 0.6, hole 0.3, Top Layer to Bottom Layer, 138 vias
v4: diameter 0.5, hole 0.3, Top Layer to Bottom Layer, tented both sides, 1 vias

## Nets (pads, with @x,y where several pads share a name; then routed paths per layer and width w, separated by ;. In a path a pad name is that pad's centre, name@x,y a point inside that pad or via, vN(x,y) a via of type N, cw(c..) or ccw(c..) an arc to the next point about the centre after c; other vN are vias at no path point)
3V3: C11.2 C12.2 C13.2 C15.2 C16.2 C17.2 C18.2 C19.2 C24.1 C30.1 C31.1 C32.2 C33.1 C34.1 C38.1 C42.1 C46.1 C47.2 C48.2 C49.2 D2.A FB1.1 FB2.1 FB3.1 FB4.1 FB5.1 L2.1 L3.2 P1.2 R4.2 R5.2 R6.2 R7.2 R11.1 R15.2 T5.1 U2.5 U3.5 U4.5 U5.5 U6.1 U7.14 U7.18 X1.1 X1.4 | length 34.1
  Top Layer w0.171: v2@49.816,20.389 v2@51.006,20.389 ; L2.1@50.448,19.845 50.448,20.395 ; L3.2@50.448,20.945 50.448,20.395 ; C13.2@51.638,19.29 C12.2@51.638,20.395 ; C11.2@51.638,21.499 C12.2@51.638,20.395 ; 50.448,20.395 C12.2@51.638,20.395
  Top Layer w0.203: D2.A@1.499,20.074 1.516,20.091 v1(3.302,20.091) ; v1@14.247,7.146 15.084,7.146 C17.2@15.088,7.15 15.135,7.103 16.433,7.103 U3.5@16.48,7.056 v1@16.48,6.219 ; v1(19.075,13.39) 19.075,12.694 U4.5@19.08,12.689 19.084,12.693 19.874,12.693 v1(19.878,12.697) 19.915,12.66 20.483,12.66 C19.2@20.521,12.623 21.466,12.623 v1(21.521,12.568) ; v1(23.038,19.207) R6.2@23.038,20.053 ; v1(24.13,19.207) R11.1@24.13,20.053 ; R7.2@25.222,20.053 25.235,20.041 25.235,19.22 v1(25.248,19.207) ; U5.5@27.484,13.858 27.49,13.852 27.567,13.852 27.569,13.854 v1(27.569,14.605) ; U5.5@27.567,13.865 28.39,13.865 v1(28.397,13.873) ; v1@28.39,13.852 28.4,13.862 29.269,13.862 C18.2@29.279,13.852 ; R5.2@28.542,23.754 v1(29.388,23.754) ; R4.2@28.542,24.82 v1(29.388,24.82)
  Top Layer w0.279: v2(18.439,23.791) 18.499,23.791 18.636,23.927 19.292,23.927 C48.2@19.308,23.911 19.469,24.072 19.601,24.072 19.677,24.148 19.677,24.81 C49.2@19.656,24.81 ; v2(19.011,24.729) 19.071,24.729 19.152,24.81 C49.2@19.656,24.81 ; v1(20.422,20.643) 20.422,20.673 20.658,20.909 R15.2@20.658,21.62 ; U7.18@21.222,24.806 20.38,24.806 20.365,24.82 C49.2@20.015,24.82 ; 22.708,28.986 22.706,28.984 22.706,28.491 22.592,28.377 C47.2@22.579,28.39 22.704,28.266 22.704,27.701 22.714,27.691 ; U7.14@22.722,26.806 22.722,27.601 ; C49.2@19.656,24.81 20.005,24.81 C49.2@20.015,24.82 ; C49.2@19.656,24.81 19.666,24.82 C49.2@20.015,24.82
  Top Layer w0.305: U2.5@27.484,17.684 C15.2@28.939,17.683 29.086,17.831 29.086,18.075 29.974,18.963 29.974,20.173 X1.4@30.035,20.234 ; v1(30.023,22.585) 30.029,22.579 30.029,21.59 X1.1@30.035,21.584
  other v1: 16.466,6.206 14.234,7.16 34.345,8.783 35.839,8.783 37.333,8.783 32.852,9.291 33.043,14.253 52.572,14.562 51.288,14.696 32.102,14.982 51.919,15.269 33.043,15.711 52.572,15.977 51.288,16.111 32.102,16.293 33.043,17.022 32.102,17.751 33.043,18.48 32.102,20.519 14.462,23.791 15.788,23.791 17.114,23.791 48.884,23.982 50.757,23.982 15.125,24.62 16.451,24.62 17.776,24.62 49.82,24.711 48.884,25.44 50.757,25.44 49.82,26.176 48.893,26.897 50.77,26.897 23.571,28.351 24.511,28.402 40.259,28.707 41.565,28.717 43.437,28.717 44.856,28.707 22.738,29.466 22.795,31.041
  other v2: 33.596,10.265 35.091,10.265 36.585,10.265 38.079,10.265 32.102,10.807 33.038,11.536 34.458,11.536 35.914,11.536 37.37,11.536 38.826,11.536 32.102,12.265 33.974,12.273 35.111,12.4 36.568,12.4 38.024,12.4 33.043,12.994 32.102,13.525 50.312,14.747 50.685,15.429 49.906,15.814 49.855,16.626 51.638,19.842 33.043,20.273 49.857,20.382 51.018,20.395 51.638,20.947 32.682,21.248 42.516,29.202 44.147,29.215 40.767,29.392 24.511,29.443 41.58,29.688 43.452,29.688 44.856,29.748 23.653,30.231 42.516,30.416 24.511,31.018 41.58,31.145 43.452,31.145 42.52,31.196
+5V: C25.1 C26.2 F1.2 U6.4 U6.6 | length 3.3
  Top Layer w0.254: C26.2@40.903,34.269 40.903,34.337 U6.6@42.022,34.337 ; U6.4@43.322,34.337 43.322,34.371 45.009,34.371 C25.1@45.009,34.737
AVDD: C27.1 C28.1 C29.1 FB2.2 U1.10 | length 5.5
  Top Layer w0.279: U1.10@43.739,19.103 44.799,19.103 C27.1@45.263,18.639
  Top Layer w0.381: C27.1@45.263,18.639 C28.1@46.33,18.639 C29.1@47.422,18.639 47.474,18.587 47.981,18.587 48.259,18.309 48.508,18.309 FB2.2@48.768,18.049
CPOUT: C2.1 C3.1 R1.1 U1.7 | length 4.1
  Top Layer w0.254: U1.7@42.539,17.903 42.562,17.88 42.562,17.34 43.325,16.577 43.363,16.577 C2.1@43.536,16.404 C3.1@44.628,16.404 R1.1@45.72,16.404
CREF: C4.1 C5.1 U1.24 | length 3
  Top Layer w0.279: C4.1@37.584,24.235 37.99,23.828 C5.1@37.99,23.092 38.28,22.803 U1.24@39.539,22.803
D_N: J4.A7 J4.B7 U7.15 U8.5 U8.6 | length 20.8
  Top Layer w0.142: J4.B7@5.466,28.881 6.16,28.187 6.518,28.187 J4.A7@6.547,28.158 ; J4.A7@6.73,28.158 7.03,28.158 7.146,28.273 8.263,28.273 9.177,28.273 9.26,28.19 9.26,28.187 9.289,28.158 U8.5@9.527,28.158 ; U8.5@9.764,28.158 9.793,28.187 9.793,28.19 9.876,28.273 10.051,28.273 10.134,28.19 10.134,28.187 10.163,28.158 U8.6@10.401,28.158 10.638,28.158 10.667,28.187 10.667,28.19 10.75,28.273 11.097,28.273 11.257,28.113 v1(11.354,28.113) ; v1(21.143,27.294) 21.211,27.226 21.211,26.999 21.449,26.762 22.186,26.762 U7.15@22.222,26.798
  Layer 4 w0.09: v1@11.425,28.113 11.612,28.299 11.802,28.299 12.446,28.3 15.467,25.279 20.947,25.279 21.55,25.881 21.55,26.624 21.193,26.98 21.193,27.244 v1(21.143,27.294)
D_P: J4.A6 J4.B6 U7.16 U8.4 U8.7 | length 21.6
  Top Layer w0.142: J4.A6@6.73,28.658 7.03,28.658 7.146,28.543 8.152,28.543 9.177,28.543 9.26,28.626 9.26,28.629 9.289,28.658 U8.4@9.527,28.658 ; U8.4@9.764,28.658 9.793,28.629 9.793,28.626 9.876,28.543 10.051,28.543 10.134,28.626 10.134,28.629 10.163,28.658 U8.7@10.401,28.658 10.638,28.658 10.667,28.629 10.667,28.626 10.75,28.543 11.097,28.543 11.257,28.703 v1(11.354,28.703) ; v1(20.726,26.877) 20.794,26.809 21.021,26.809 21.258,26.571 21.258,25.834 U7.16@21.222,25.798
  Layer 4 w0.09: v1@11.425,28.703 11.612,28.516 11.712,28.516 12.536,28.517 15.557,25.496 20.857,25.496 21.333,25.971 21.333,26.534 21.04,26.827 20.776,26.827 v1(20.726,26.877)
  Layer 4 w0.142: J4.B6@5.52,28.008 7.279,28.008 7.942,28.671 v2(7.942,28.731)
DVDD: C35.1 C36.1 C37.1 FB3.2 U1.28 | length 5.3
  Top Layer w0.305: C35.1@37.389,21.042 37.829,20.603 U1.28@38.839,20.603
  Top Layer w0.381: C37.1@35.255,21.042 C36.1@36.322,21.042 ; FB3.2@35.839,19.714 35.839,19.764 36.322,20.246 C36.1@36.322,21.042 ; C35.1@37.389,21.042 C36.1@36.322,21.042
EN_EXTREF: R20.2 U5.1 U7.20 | length 31
  Top Layer w0.127: R20.2@3.319,15.926 3.345,15.9 v1(4.42,15.9) ; v2(20.445,23.574) 20.546,23.574 20.691,23.72 21.136,23.72 U7.20@21.222,23.806
  Top Layer w0.171: v1(23.876,13.869) 23.881,13.863 24.787,13.863 U5.1@24.792,13.869
  Layer 4 w0.127: v1(4.42,15.9) 5.354,15.9 5.735,16.281 16.484,16.281 18.974,18.771 ; v2(20.445,23.574) 18.974,22.103 18.974,18.771 ; v1(23.876,13.869) 18.974,18.771
EN_INTREF: U2.1 U7.19 | length 11
  Top Layer w0.127: v2(20.424,24.18) 20.525,24.18 20.651,24.306 U7.19@21.222,24.306 ; v1(23.774,17.658) 24.858,17.658 U2.1@24.884,17.684
  Layer 4 w0.127: v2(20.424,24.18) 20.429,24.175 20.864,24.175 21.144,23.895 21.144,18.84 22.327,17.658 v1(23.774,17.658)